# Altium PCB HBridge.PcbDoc (part 1 of 4)
Units mil, origin at the board's own origin, x right, y up, seen from the top; angles counter-clockwise.
Board outline 2900.19 x 4650 mil, 2 copper layers (Top Layer, Bottom Layer), stack 33.512 mil thick; 136 components, 122 nets, 499 pads, 559 vias.
Unrouted connection lines stored in the file: 1.
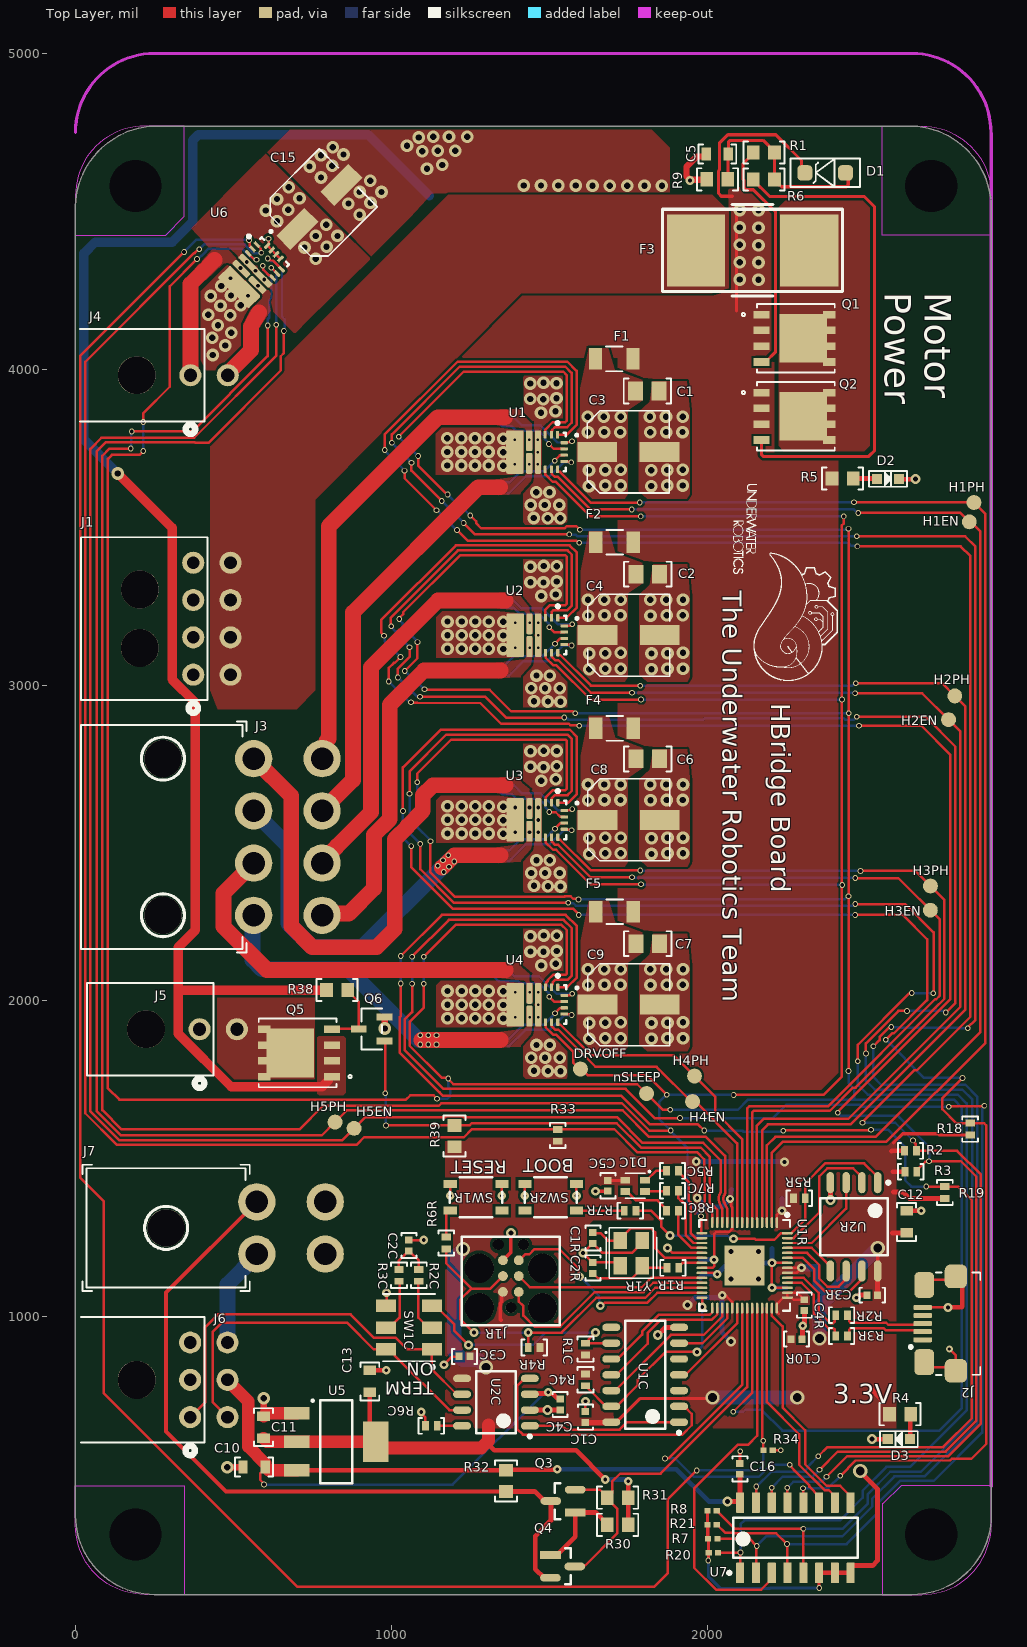
[diagram p0: Top Layer view]
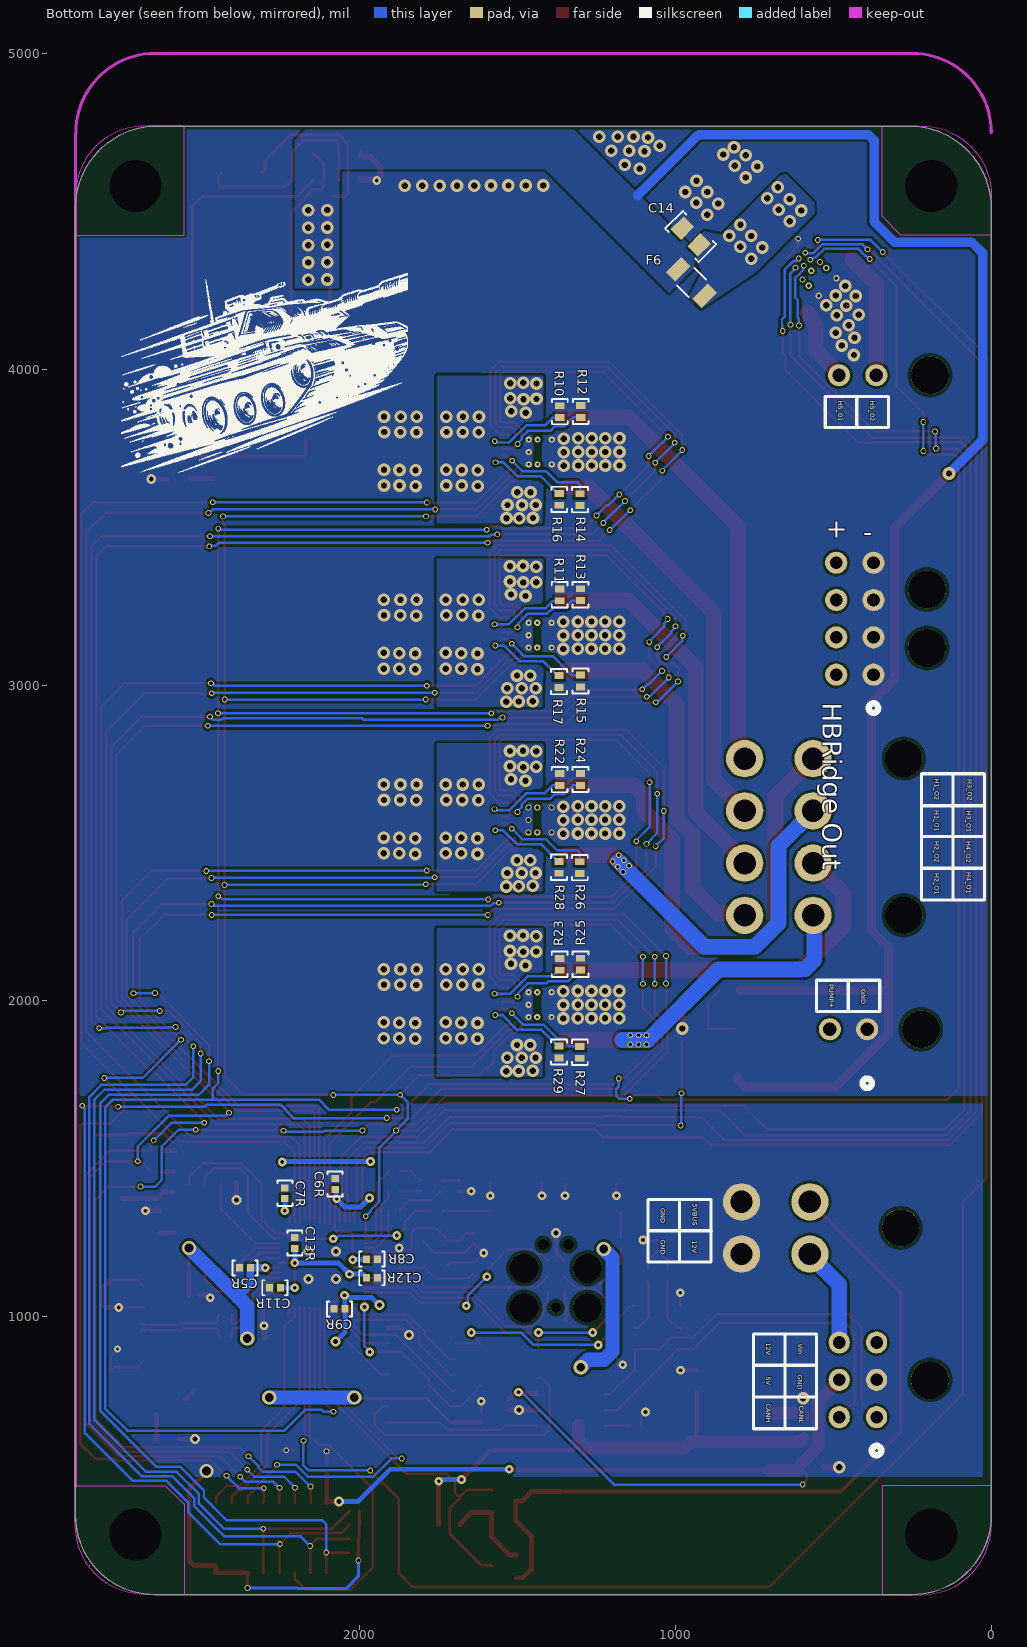
[diagram p1: Bottom Layer view, seen from below]
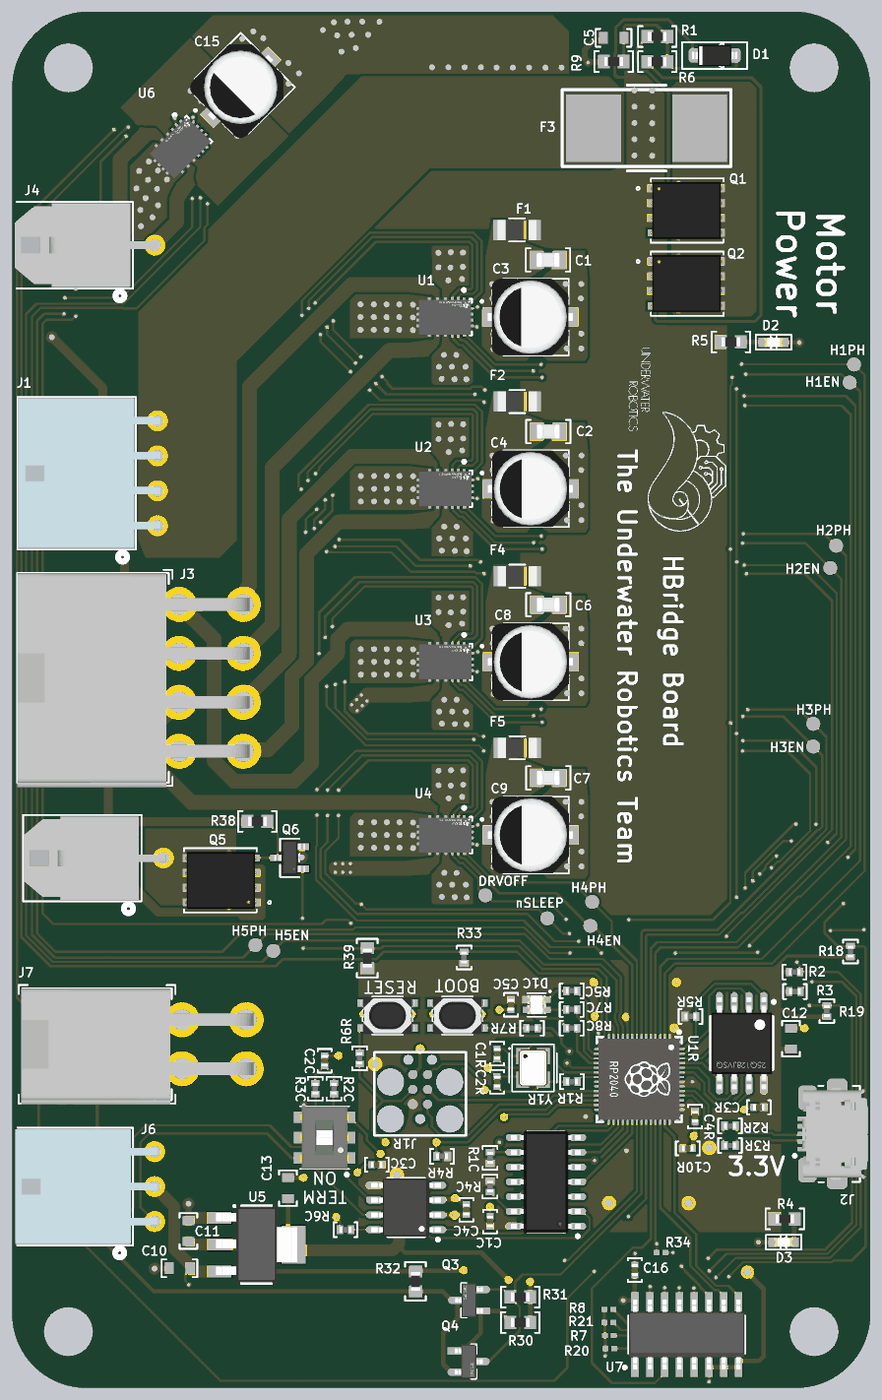
[diagram p4: 3D render of the assembled board from above, using the file's embedded part models]
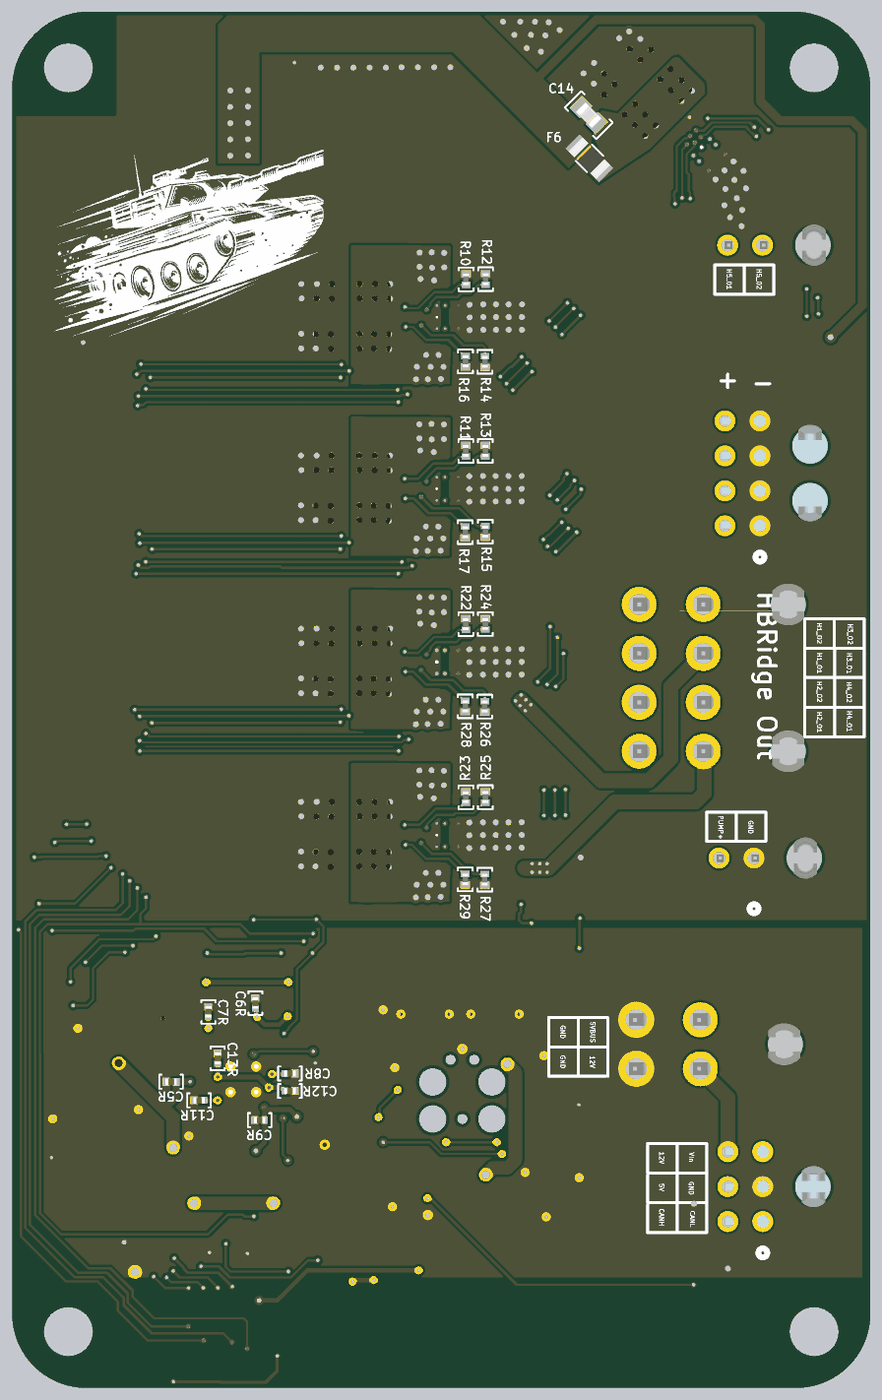
[diagram p5: 3D render of the assembled board from below, using the file's embedded part models]

## Layer stack, top to bottom
Top Solder: solder mask 1, SM-001, Dk 4
Top Layer: signal copper 2.7559
Dielectric 3: core 28, Core-039, Dk 4.8
Bottom Layer: signal copper 2.7559
Bottom Solder: solder mask 1, SM-001, Dk 4

## Board outline
0,370 0,4500 cw(c260,4510) 250,4770 2649.88,4770 cw(c2639.94,4509.94) 2900,4500 2900,4420 2899.88,350 2900,370 cw(c2649.94,370.06) 2649.88,120 250,120 cw(c250,370)

## Design rules (kind name [scope] priority, off if disabled: settings)
AcuteAngle [All] p1: minimum=8.00000000000000E+0001 checktracksonly=FALSE
BoardOutlineClearance "BoardOutlineClearance JLCPCB" [All] p1: gap=11.81 ignorepadtopadclearanceinfootprint=FALSE
Clearance "Clearance JLCPCB 4 layer" [All] p1: gap=7.87 ignorepadtopadclearanceinfootprint=FALSE except(5: Arc-SMDPad Arc-Via Track-SMDPad Track-Via SMDPad-SMDPad; 6.3: Arc-Arc Arc-Track Track-Track; 9.45: THPad-THPad THPad-Via Via-Via; 10: Arc-Hole Track-Hole SMDPad-Hole THPad-Hole Via-Hole Fill-Hole Poly-Hole Region-Hole Text-Hole)
DiffPairsRouting "Diff Pairs USB 2.0" [InDifferentialPairClass('USB 2.0')] p1: maxlimit=10 minlimit=5 mostfreqgap=7 toplayer_minwidth=7.87 toplayer_maxwidth=7.87 toplayer_prefwidth=7.87 bottomlayer_minwidth=7.87 bottomlayer_maxwidth=7.87 bottomlayer_prefwidth=7.87 maxuncoupledlength=500
DiffPairsRouting "Diff Pairs PCIe Gen 2" [InDifferentialPairClass('PCIe Gen 2')] p2: maxlimit=5 minlimit=5 mostfreqgap=5 toplayer_minwidth=5.53 toplayer_maxwidth=5.53 toplayer_prefwidth=5.53 bottomlayer_minwidth=5.53 bottomlayer_maxwidth=5.53 bottomlayer_prefwidth=5.53 impedanceprofiledriven=TRUE impedanceprofileid={D86E5A41-F98B-413D-93FD-A6E48D035561} maxuncoupledlength=500
HoleSize "HoleSize JLCPCB Pad" [IsPad] p1: absolutevalues=TRUE maxlimit=248.03 minlimit=19.68 maxpercent=80.000 minpercent=20.000
HoleSize "HoleSize JLCPCB 4 layer Cheap" [All] p2: absolutevalues=TRUE maxlimit=248.03 minlimit=11.81 maxpercent=80.000 minpercent=20.000
HoleToHoleClearance "HoleToHoleClearance JLCPCB Same Net" [All] p1: gap=10 allowstackedmicrovias=TRUE
MinimumAnnularRing "MinimumAnnularRing JLCPCB Via" [All] p1: minimumring=2.95
MinimumAnnularRing "MinimumAnnularRing JLCPCB Pad" [IsPad] p2: minimumring=9.84
MinimumAnnularRing "MinimumAnnularRing JLCPCB 1oz" [All] p3: minimumring=5.12
MinimumSolderMaskSliver "MinimumSolderMaskSliver JLCPCB" [All] p1: minsoldermaskwidth=3.94
PlaneClearance [All] p1: clearance=11.81
PlaneConnect [All] p1: planeconnectstyle=Direct reliefexpansion=20 reliefentries=4 reliefconductorwidth=10 reliefairgap=10
PolygonConnect [All] p1: connectstyle=Direct reliefconductorwidth=15 reliefentries=4 polygonreliefangle="45 Angle" airgapwidth=10
RoutingVias "RoutingVias JLCPCB 4 layer" [All] p1: holewidth=19.68 width=39.37 viastyle="Through Hole" minholewidth=11.81 minwidth=17.72 maxholewidth=50 maxwidth=80 useviatemplates=TRUE
SilkToSilkClearance [All] p1: silktosilkclearance=3
SilkToSolderMaskClearance "SilkToSolderMaskClearance JLCPCB" [IsPad] p1: minsilkscreentomaskgap=5.91 clearancetoexposedcopper=TRUE
SolderMaskExpansion "SolderMaskExpansion JLCPCB" [All] p1: expansion=1.5 istentingtop=FALSE
UnRoutedNet [All] p1: checkbadconnections=TRUE
Width "Width JLCPCB 4 layer" [All] p1: maxlimit=196.85 minlimit=7.09 preferedwidth=9.84 minimp=50.000000 maximp=50.000000 favimp=50.000000
21 further rules are at their usual default settings.

## Classes and differential pairs
component class HBridge: C1 C2 C3 C4 C5 C6 C7 C8 C9 C10 C11 C12 C13 C14 C15 C16 D1 D2 D3 DRVOFF F1 F2 F3 F4 F5 F6 H1EN H1PH H2EN H2PH H3EN H3PH H4EN H4PH H5EN H5PH J1 J2 J3 J4 J5 J6 J7 nSLEEP Q1 Q2 Q3 Q4 Q5 Q6 R1 R2 R3 R4 R5 R6 R7 R8 R9 R10 R11 R12 R13 R14 R15 R16 R17 R18 R19 R20 R21 R22 R23 R24 R25 R26 R27 R28 R29 R30 R31 R32 R33 R38 R39 U1 U2 U3 U4 U5 U6 U7
differential pair class "USB 2.0": USB USB_RP2040
component class U_RP2040_with_CAN: C1C C2C C3C C4C C5C D1C R1C R2C R3C R4C R5C R6C R7C R8C SW1C U1C U2C
component class U_RP2040_C: C1R C2R C3R C4R C5R C6R C7R C8R C9R C10R C11R C12R C13R J1R R1R R2R R3R R4R R5R R6R R7R SW1R SW2R U1R U2R Y1R
differential pair USB: +USB_P -USB_N
differential pair USB_RP2040: +USB_RP2040_P -USB_RP2040_N

## Components (designator, comment, footprint, x,y, rotation, side; value= is the part's Value field where it differs from the comment)
C1 "100nF Ceramic 50V" CAPACITOR_0805 1810.96,3931.13 r180 top value=0.1uF
C1C "100nF Ceramic 25V" CAPACITOR_0402 1614.92,682.05 r90 top value=0.1uF
C1R "27pF Ceramic 50V" CAPACITOR_0402 1638.54,1248.98 r270 top value=27pF
C2 "100nF Ceramic 50V" CAPACITOR_0805 1811.81,3351.13 r180 top value=0.1uF
C2C "4700pF Ceramic 25V" CAPACITOR_0402 1055.87,1225.35 r270 top value=4.7nF
C2R "27pF Ceramic 50V" CAPACITOR_0402 1638.54,1154.49 r90 top value=27pF
C3 "10uF electrolytic 63V" CAP_EEHZC1J100P 1750.58,3738 r0 top value=10uF
C3C "100nF Ceramic 25V" CAPACITOR_0402 1231.89,874.17 r180 top value=0.1uF
C3R "100nF Ceramic 6.3V" CAPACITOR_0402 2523.19,1067.87 r180 top value=0.1uF
C4 "10uF electrolytic 63V" CAP_EEHZC1J100P 1751.42,3158 r0 top value=10uF
C4C "100nF Ceramic 25V" CAPACITOR_0402 1535,722 r270 top value=0.1uF
C4R "1uF Ceramic 16V" CAPACITOR_0402 2307.83,1036.38 r270 top value=1uF
C5 "1uF Ceramic 16V" CAPACITOR_0603 2032.5,4681.5 r0 top value=1uF
C5C "1uF Ceramic 16V" CAPACITOR_0402 1685.79,1414.33 r270 top value=1uF
C5R "100nF Ceramic 6.3V" CAPACITOR_0402 2362.95,1154.49 r0 bottom value=0.1uF
C6 "100nF Ceramic 50V" CAPACITOR_0805 1811.81,2766.13 r180 top value=0.1uF
C6R "100nF Ceramic 6.3V" CAPACITOR_0402 2078,1420 r90 bottom value=0.1uF
C7 "100nF Ceramic 50V" CAPACITOR_0805 1811.81,2181.13 r180 top value=0.1uF
C7R "100nF Ceramic 6.3V" CAPACITOR_0402 2236.97,1390.71 r90 bottom value=0.1uF
C8 "10uF electrolytic 63V" CAP_EEHZC1J100P 1751.43,2573 r0 top value=10uF
C8R "100nF Ceramic 6.3V" CAPACITOR_0402 1961.38,1182.15 r180 bottom value=0.1uF
C9 "10uF electrolytic 63V" CAP_EEHZC1J100P 1751.42,1988 r0 top value=10uF
C9R "100nF Ceramic 6.3V" CAPACITOR_0402 2063.74,1024.57 r0 bottom value=0.1uF
C10 "10uF Ceramic 6.3V" CAPACITOR_0603 565.49,524 r180 top
C10R "100nF Ceramic 6.3V" CAPACITOR_0402 2283,929 r0 top value=0.1uF
C11 "10uF Ceramic 6.3V" CAPACITOR_0603 595.49,650 r90 top
C11R "1uF Ceramic 16V" CAPACITOR_0402 2268.46,1091.5 r0 bottom value=1uF
C12 "10uF Ceramic 6.3V" CAPACITOR_0603 2632,1300 r90 top
C12R "100nF Ceramic 6.3V" CAPACITOR_0402 1961.38,1122.99 r180 bottom value=0.1uF
C13 "10uF Ceramic 6.3V" CAPACITOR_0603 932,795 r90 top
C13R "100nF Ceramic 6.3V" CAPACITOR_0402 2205.47,1233.23 r90 bottom value=0.1uF
C14 "100nF Ceramic 50V" CAPACITOR_0805 951.6,4420.3 r225 bottom value=0.1uF
C15 "10uF electrolytic 63V" CAP_EEHZC1J100P 772.21,4514.38 r45 top value=10uF
C16 "100nF Ceramic 25V" CAPACITOR_0402 2104,518.13 r270 top value=0.1uF
D1 "Zener_Diode_10V_410mW" SOD-123 2374,4622 r180 top
D1C "EAST1616RGBB4" LED_0606_4SMD 1772.4,1414.33 r180 top
D2 "150060BS75000" LED_0603 2573,3653 r0 top
D3 "150060GS75000" LED_0603 2607,612 r180 top
DRVOFF "PCB Test Point" TESTPOINT_1.2MM 1599,1784 r0 top (schematic designator TP1)
F1 "0685H9150-01" 0501Series_LTF 1706.15,4032.51 r180 top
F2 "0685H9150-01" 0501Series_LTF 1707,3452.51 r180 top
F3 "1245HC60-RTR" "2-SMD Fuse" 2144,4376.52 r0 top
F4 "0685H9150-01" 0501Series_LTF 1707,2862.51 r180 top
F5 "0685H9150-01" 0501Series_LTF 1707,2282.51 r180 top
F6 "0685H9150-01" 0501Series_LTF 949.17,4274.5 r225 bottom
H1EN "PCB Test Point" TESTPOINT_1.2MM 2830.25,3516.81 r0 top (schematic designator TP2)
H1PH "PCB Test Point" TESTPOINT_1.2MM 2845,3578 r0 top (schematic designator TP5)
H2EN "PCB Test Point" TESTPOINT_1.2MM 2764.63,2890.37 r0 top (schematic designator TP3)
H2PH "PCB Test Point" TESTPOINT_1.2MM 2784.33,2965.68 r0 top (schematic designator TP6)
H3EN "PCB Test Point" TESTPOINT_1.2MM 2707,2287 r180 top (schematic designator TP7)
H3PH "PCB Test Point" TESTPOINT_1.2MM 2707.3,2363.72 r180 top (schematic designator TP9)
H4EN "PCB Test Point" TESTPOINT_1.2MM 1954,1681 r0 top (schematic designator TP8)
H4PH "PCB Test Point" TESTPOINT_1.2MM 1960.11,1761.89 r90 top (schematic designator TP10)
H5EN "PCB Test Point" TESTPOINT_1.2MM 882.39,1596.39 r0 top (schematic designator TP11)
H5PH "PCB Test Point" TESTPOINT_1.2MM 822,1616 r90 top (schematic designator TP12)
J1 "Microfit+ R/A" CONN_MOLEX_MICROFIT+_8POS_R/A 373,3032.89 r270 top
J1R "TagConnect SWD" TC2030-MCP 1378.7,1028.5 r90 top
J2 "USB_MICRO R/A" CONN_MINIUSB 2788,978 r90 top
J3 "Mini-Fit Jr R/A" "CONN_MOLEX_MINIFIT JR_8 POS_R/A" 277,2767 r270 top
J4 "Microfit R/A" "CONN_MOLEX_MICROFIT_2 POS_R/A" 364.02,3981 r270 top
J5 "Microfit R/A" "CONN_MOLEX_MICROFIT_2 POS_R/A" 393.08,1910 r270 top
J6 "Microfit+ R/A" CONN_MOLEX_MICROFIT_6_POS_R/A 363.3,800 r270 top
J7 "Mini-Fit Jr R/A" "CONN_MOLEX_MINIFIT JR_4 POS_R/A" 287,1281 r270 top
nSLEEP "PCB Test Point" TESTPOINT_1.2MM 1808.5,1706.5 r0 top (schematic designator TP4)
Q1 "MOSFET P-Ch 30V 60A SO-8" MOSFET_7DP-T1-GE3_VIS#1 2279.5,4098.01 r0 top
Q2 "MOSFET P-Ch 30V 60A SO-8" MOSFET_7DP-T1-GE3_VIS#1 2279.5,3851 r0 top
Q3 "MMBT3904-7-F" FP-SOT23-IPC_A 1544,416 r180 top
Q4 "MMBT3904-7-F" FP-SOT23-IPC_A 1542.55,209 r0 top
Q5 "SIR167DP-T1-GE3" MOSFET_7DP-T1-GE3_VIS#2 705.2,1835 r180 top
Q6 "AO3404A" SOT-23-3 938,1911 r90 top
R1 "27 Ohm 5% 1/8W" RESISTOR_0603 2180,4685.99 r0 top
R1C "10k Ohm 1% 1/16W" RESISTOR_0402 1614.92,897.2 r90 top
R1R "1k Ohm 1% 1/16W" RESISTOR_0402 1891.57,1154.49 r180 top
R2 "10k Ohm 1% 1/16W" RESISTOR_0402 2644,1525 r0 top
R2C "60.4 Ohm 1% 1/16W" RESISTOR_0402 1087.36,1130.87 r90 top
R2R "27 Ohm 1% 1/16W" RESISTOR_0402 2425.94,1004.88 r180 top
R3 "10k Ohm 1% 1/16W" RESISTOR_0402 2645,1458.99 r0 top
R3C "60.4 Ohm 1% 1/16W" RESISTOR_0402 1024.37,1130.87 r90 top
R3R "27 Ohm 1% 1/16W" RESISTOR_0402 2425.94,938.87 r180 top
R4 "62 Ohm 1% 1/4W" RESISTOR_0603 2611,691 r180 top
R4C "10k Ohm 1% 1/16W" RESISTOR_0402 1614.92,800.16 r270 top
R4R "10k Ohm 1% 1/16W" RESISTOR_0402 1452.52,902.52 r180 top
R5 "1k Ohm 5% 1/8W" RESISTOR_0603 2429,3654 r0 top
R5C "604 Ohm 1% 1/16W" RESISTOR_0402 1890.51,1461.57 r180 top
R5R "10k Ohm 1% 1/16W" RESISTOR_0402 2292.09,1374.96 r0 top
R6 "27 Ohm 5% 1/8W" RESISTOR_0603 2180,4600.99 r180 top
R6C "10k Ohm 1% 1/16W" RESISTOR_0402 1126.73,654.29 r180 top
R6R "1k Ohm 1% 1/16W" RESISTOR_0402 1173.98,1233.23 r270 top
R7 "RC0402FR-07210RL" RESC1005X40X25LL05T10 2018,297 r0 top
R7C "200 Ohm 1% 1/16W" RESISTOR_0402 1890.51,1398.58 r180 top
R7R "1k Ohm 1% 1/16W" RESISTOR_0402 1756.65,1335.59 r0 top
R8 "RC0402FR-07210RL" RESC1005X40X25LL05T10 2016,385 r0 top
R8C "200 Ohm 1% 1/16W" RESISTOR_0402 1890.51,1335.59 r180 top
R9 "1k Ohm 5% 1/8W" RESISTOR_0603 2032.5,4601.5 r180 top
R10 "0 Ohm 1% 1/16W" RESISTOR_0402 1366.15,3865.7 r90 bottom
R11 "0 Ohm 1% 1/16W" RESISTOR_0402 1367,3285.7 r90 bottom
R12 "0 Ohm 1% 1/16W" RESISTOR_0402 1300.15,3866 r90 bottom
R13 "0 Ohm 1% 1/16W" RESISTOR_0402 1301,3286 r90 bottom
R14 "0 Ohm 1% 1/16W" RESISTOR_0402 1302.15,3587 r270 bottom
R15 "0 Ohm 1% 1/16W" RESISTOR_0402 1301,3013 r270 bottom
R16 "0 Ohm 1% 1/16W" RESISTOR_0402 1368.15,3587.99 r270 bottom
R17 "0 Ohm 1% 1/16W" RESISTOR_0402 1369,3011 r270 bottom
R18 "10k Ohm 1% 1/16W" RESISTOR_0402 2833,1594 r90 top
R19 "10k Ohm 1% 1/16W" RESISTOR_0402 2753,1393 r90 top
R20 "210" RESC1005X40X25LL05T10 2020,253 r0 top
R21 "RC0402FR-07210RL" RESC1005X40X25LL05T10 2016,341 r0 top
R22 "0 Ohm 1% 1/16W" RESISTOR_0402 1367,2700.7 r90 bottom
R23 "0 Ohm 1% 1/16W" RESISTOR_0402 1367,2115.7 r90 bottom
R24 "0 Ohm 1% 1/16W" RESISTOR_0402 1301,2701 r90 bottom
R25 "0 Ohm 1% 1/16W" RESISTOR_0402 1301,2116 r90 bottom
R26 "0 Ohm 1% 1/16W" RESISTOR_0402 1303,2422 r270 bottom
R27 "0 Ohm 1% 1/16W" RESISTOR_0402 1303,1837 r270 bottom
R28 "0 Ohm 1% 1/16W" RESISTOR_0402 1369,2422.96 r270 bottom
R29 "0 Ohm 1% 1/16W" RESISTOR_0402 1369,1837.96 r270 bottom
R30 "1k Ohm 5% 1/8W" RESISTOR_0603 1717,340.82 r180 top
R31 "1k Ohm 5% 1/8W" RESISTOR_0603 1717,426.83 r180 top
R32 "1k Ohm 5% 1/8W" RESISTOR_0603 1363,480 r270 top
R33 "10k Ohm 1% 1/16W" RESISTOR_0402 1527,1574 r90 top
R34 "RC0402FR-07210RL" RESC1005X40X25LL05T10 2193,577 r180 top (schematic designator R21)
R38 "10k Ohm 5% 1/10W" RESISTOR_0603 828.5,2033.93 r0 top
R39 "10k Ohm 5% 1/10W" RESISTOR_0603 1200,1572 r90 top
SW1C "Switch DPDT" CAS-220TA 1055.87,965.51 r90 top
SW1R "434123025826" SMD_434123025826 1268.46,1377.91 r180 top
SW2R "434123025826" SMD_434123025826 1504.69,1377.91 r180 top
U1 "DRV8243HQRXYRQ1" FP-RXY0014A-MFG 1462.5,3737.84 r270 top
U1C "MCP2517FD" SOIC-14 1803.9,815.91 r180 top
U1R "RP2040" "QFN-56 RP2040" 2118.86,1162.36 r270 top locked
U2 "DRV8243HQRXYRQ1" FP-RXY0014A-MFG 1463.35,3157.84 r270 top
U2C "CAN Transceiver" SOIC-8 1331.46,729.29 r180 top
U2R "W25Q128JVSIQ" "SOIC-8 W25QxJV" 2465.32,1284.47 r270 top
U3 "DRV8243HQRXYRQ1" FP-RXY0014A-MFG 1463.35,2572.84 r270 top
U4 "DRV8243HQRXYRQ1" FP-RXY0014A-MFG 1463.35,1987.84 r270 top
U5 "LM1117IMPX-3.3/NOPB" SOT-223-4 826,604 r0 top
U6 "DRV8243HQRXYRQ1" FP-RXY0014A-MFG 568.52,4310.57 r315 top
U7 "CD74HC4051M96" D0016A_M 2279.81,300 r90 top
Y1R "CRYSTAL 12.0000MHZ 18PF SMD" "4-SMD, NO LEAD CRYSTAL 3.2x2.5mm" 1725.16,1241.1 r270 top

## Footprints (in the part's own frame and the unit in brackets; to place one, negate y for a bottom-side part, rotate by r counter-clockwise, add the part's x,y. Pads: shape width x height; smd on the part's side, far side on the other; paste and mask are expansions set on the pad)
"2-SMD Fuse" [mm]
  rect 4.7x5.8 smd paste+0 mask+0: 1(-4.55,0) 2(4.55,0)
  silkscreen extent -7.24,-3.68 7.24,3.68
"4-SMD, NO LEAD CRYSTAL 3.2x2.5mm" [mm]
  rrect0% 1.4x1.1 smd: 1(0,0) 2(2.032,0) 3(2.032,1.778) 4(0,1.778)
  silkscreen extent -1.02,-1.2 3.05,2.92, body extent -0.58,-0.36 2.62,2.14, height 0.82
0501Series_LTF [mil]
  rect 42x68 smd paste+0 mask+0: 1(-59.5,0) 2(59.5,0)
  silkscreen extent -26,-39 26,39, body extent -66,-34 66,34, height 23
CAP_EEHZC1J100P [mm]
  rect 3.2x1.6 smd: 1(-2.5,0) 2(2.5,0)
  silkscreen extent -4.25,-3.3 3.3,3.3, body extent -3.65,-3.3 3.65,3.3, height 5.8
CAPACITOR_0402 [mm]
  rect 0.56x0.6 smd: 1(-0.435,0) 2(0.435,0)
  silkscreen extent -1.02,-0.6 1.02,0.6, body extent -0.5,-0.28 0.5,0.27, height 0.51
CAPACITOR_0603 [mil] "CAPACITOR 0603"
  rect 30x40 smd: 1(-35,0) 2(35,0)
  silkscreen extent -60,-30 60,30, body extent -31,-16 32,16, height 31
CAPACITOR_0805 [mm] "CAPACITOR 0805"
  rect 1.2x1.5 smd: 1(-0.95,0) 2(0.95,0)
  silkscreen extent -1.91,-1 1.9,1, body extent -1,-0.62 1,0.63, height 1.26
CAS-220TA [mm] "SWITCH SLIDE DPDT 100MA 6V"
  rrect0% 1x1.6 smd: 1(-1.75,-1.85) 2(0,-1.85) 3(1.75,-1.85) 4(-1.75,1.85) 5(0,1.85) 6(1.75,1.85)
  silkscreen extent -3.3,-2.1 2.7,2.1, body extent -2.7,-2.1 2.7,2.1, height 2.51
CONN_MINIUSB [mm] "USB2.0 Micro-B Receptacle SMD R/A"
  rrect50% 0.4x1.5 smd: 1(-1.3,2.675) 2(-0.65,2.675) 3(0,2.675) 4(0.65,2.675) 5(1.3,2.675)
  rrect50% 2.1x1.6 smd: 6(-3.1,2.55) 7(3.1,2.55)
  rrect50% 1.9x1.8 smd: 8(3.8,0) 9(-3.8,0)
  silkscreen extent -4.14,-1.96 4.11,3.75, body extent -3.96,-2.67 3.96,2.99, height 2.72
CONN_MOLEX_MICROFIT+_8POS_R/A [mil] "MICROFIT+ 212528"
  round 70 / inner oval 60x70 / far side round 70 hole 40 paste-99999 mask+0: 1(0,0) 2(-118.11,0) 3(-236.22,0) 4(-354.33,0) 5(0,118.11) 6(-118.11,118.11) 7(-236.22,118.11) 8(-354.33,118.11)
  round 120 / inner round 60 / far side round 120 hole 120 unplated paste-99999 mask-60: 9(-269.68,-169.29) 10(-84.65,-169.29)
  silkscreen extent -435,-355 121,45, body extent -431,-351 75,131, height 325
"CONN_MOLEX_MICROFIT_2 POS_R/A" [mil] "0430450200"
  round 70 hole 42 paste-99999 mask+0: 1(0,0) 2(0,118.11)
  round 120 / inner round 60 / far side round 120 hole 120 unplated paste-99999 mask-60: 3(0,-170.08)
  silkscreen extent -146,-349 186,44, body extent -141,-355 141,127, height 343
CONN_MOLEX_MICROFIT_6_POS_R/A [mil] "CONN HEADER R/A 6POS 3MM"
  round 70 / inner round 70 / far side oval 70x66.93 hole 40 paste-99999 mask+0: 1(118.11,0) 2(0,0) 3(-118.11,0) 4(118.11,118.11) 5(0,118.11) 6(-118.11,118.11)
  round 120 / inner round 60 / far side round 120 hole 120 unplated paste-99999 mask-60: 7(0,-169.29)
  silkscreen extent -199,-346 239,45, body extent -194,-353 194,129, height 325
"CONN_MOLEX_MINIFIT JR_4 POS_R/A" [mm] "Molex Minifit Jr 5569 4 Pos R/A"
  round 3 hole 1.8: 1(2.1,7.3) 2(-2.1,7.3) 3(2.1,12.8) 4(-2.1,12.8)
  round 3 hole 3 unplated mask+0: ""(0,0)
  silkscreen extent -5.08,-6.73 5.08,6.73, body extent -4.8,-6.5 5.2,13.44, height 11.4
"CONN_MOLEX_MINIFIT JR_8 POS_R/A" [mm] "Molex Minifit Jr 5569 8 Pos R/A"
  round 3 hole 1.801: 1(12.6,7.3) 2(8.4,7.3) 5(12.6,12.8) 6(8.4,12.8)
  round 3 hole 1.8: 3(4.2,7.3) 4(0,7.3) 7(4.2,12.8) 8(0,12.8)
  round 3 hole 3 unplated mask+0: ""(0,0) ""(12.6,0)
  silkscreen extent -2.98,-6.6 15.58,6.73, body extent -2.7,-6.6 15.7,13.34, height 11.01
D0016A_M [mm] "SOIC, 16-Leads, Body 10x4mm, Pitch 1.27mm, IPC Low Density"
  rrect15% 1.65x0.65 smd: 1(-2.825,4.445) 2(-2.825,3.175) 3(-2.825,1.905) 4(-2.825,0.635) 5(-2.825,-0.635) 6(-2.825,-1.905) 7(-2.825,-3.175) 8(-2.825,-4.445) 9(2.825,-4.445) 10(2.825,-3.175) 11(2.825,-1.905) 12(2.825,-0.635) 13(2.825,0.635) 14(2.825,1.905) 15(2.825,3.175) 16(2.825,4.445)
  silkscreen extent -2.95,-5 1.6,5.44, body extent -3,-4.95 3,4.95, height 1.59
FP-RXY0014A-MFG [mm]
  rrect40% 0.6x0.25 smd paste+0 mask-1000: 1(-1.4,1.625) 2(-1.4,1.125) 3(-1.4,0.625) 8(1.4,0.625) 9(1.4,1.125) 10(1.4,1.625)
  rrect40% 3.5x0.5 smd paste-1000 mask-1000: 4(0,0.05)
  rrect40% 1.675x0.5 smd paste-1000 mask-1000: 5(-0.913,-0.65) 7(0.913,-0.65)
  rrect14% 3.5x1.4 smd paste-1000 mask-1000: 6(0,-1.8)
  rrect40% 0.25x0.6 smd paste+0 mask-1000: 11(0.75,2.15) 12(0.25,2.15) 13(-0.25,2.15) 14(-0.75,2.15)
  silkscreen extent -2.45,1.5 1.55,2.3, body extent -1.85,-2.6 1.85,2.55, height 0.25
FP-SOT23-IPC_A [mm]
  rect 1.659x0.627 smd paste+0 mask+0: 1(-0.977,0.915)
  rrect100% 1.659x0.627 smd paste+0 mask+0: 2(-0.977,-0.915) 3(0.977,0)
  silkscreen extent 0.23,-1.45 0.65,1.45, body extent -2.31,-1.95 2.31,1.95, height 0.25
LED_0603 [mil] "LED 0603"
  rect 32x32 smd: 1(-35,0) 2(35,0)
  silkscreen extent -60,-25 60,25, body extent -31,-16 32,16, height 28
LED_0606_4SMD [mm]
  rrect0% 0.8x0.55 smd: 1(-0.8,-0.45) 2(-0.8,0.45) 3(0.8,0.45) 4(0.8,-0.45)
  silkscreen extent -1.22,-1.22 0.8,1.02, body extent -0.8,-0.8 0.8,0.8, height 0.35
MOSFET_7DP-T1-GE3_VIS#1 [mil]
  rect 50x24 smd: 1(-107.5,75) 2(-107.5,25) 3(-107.5,-25) 4(-107.5,-75)
  rect 150x154 smd: D(24.5,0)
  rect 40x24 smd: D(107.5,-75) D(107.5,-25) D(107.5,25) D(107.5,75)
  silkscreen extent -169,-108 125,108, body extent -121,-101 121,101, height 41
MOSFET_7DP-T1-GE3_VIS#2 [mil]
  rect 50x24 smd: 1(-107.5,75) 2(-107.5,25) 3(-107.5,-25) 4(-107.5,-75)
  rect 150x154 smd: D(24.5,0)
  rect 40x24 smd: D(107.5,75) D(107.5,-25) D(107.5,25) D(107.5,-75)
  Top Layer region: 1.75,77 1.75,77 1.75,77 1.75,77 1.75,77 1.75,77 1.75,77 1.75,77
  Top Layer region: 1.75,-77 1.75,-77 1.75,-77 1.75,-77 1.75,-77 1.75,-77 1.75,-77 1.75,-77
  silkscreen extent -170,-109 125,109, body extent -121,-101 121,101, height 41
"QFN-56 RP2040" [mm] "QFN, 56-Leads, Body 7.00x7.00mm, Pitch 0.40mm, Thermal Pad 3.10x3.10mm, IPC Medium Density"
  oval 0.875x0.2 smd: 1(-3.437,2.6) 2(-3.437,2.2) 3(-3.437,1.8) 4(-3.437,1.4) 5(-3.437,1) 6(-3.437,0.6) 7(-3.437,0.2) 8(-3.437,-0.2) 9(-3.437,-0.6) 10(-3.437,-1) 11(-3.437,-1.4) 12(-3.437,-1.8) 13(-3.437,-2.2) 14(-3.437,-2.6) 29(3.437,-2.6) 30(3.437,-2.2) 31(3.437,-1.8) 32(3.437,-1.4) 33(3.437,-1) 34(3.437,-0.6) 35(3.437,-0.2) 36(3.437,0.2) 37(3.437,0.6) 38(3.437,1) 39(3.437,1.4) 40(3.437,1.8) 41(3.437,2.2) 42(3.437,2.6)
  oval 0.2x0.875 smd: 15(-2.6,-3.437) 16(-2.2,-3.437) 17(-1.8,-3.437) 18(-1.4,-3.437) 19(-1,-3.437) 20(-0.6,-3.437) 21(-0.2,-3.437) 22(0.2,-3.437) 23(0.6,-3.437) 24(1,-3.437) 25(1.4,-3.437) 26(1.8,-3.437) 27(2.2,-3.437) 28(2.6,-3.437) 43(2.6,3.437) 44(2.2,3.437) 45(1.8,3.437) 46(1.4,3.437) 47(1,3.437) 48(0.6,3.437) 49(0.2,3.437) 50(-0.2,3.437) 51(-0.6,3.437) 52(-1,3.437) 53(-1.4,3.437) 54(-1.8,3.437) 55(-2.2,3.437) 56(-2.6,3.437)
  rect 3.2x3.2 smd: 57(0,0)
  silkscreen extent -4.19,-3.65 3.65,3.65, body extent -3.52,-3.52 3.52,3.52, height 0.85
RESC1005X40X25LL05T10 [mm] "Chip Resistor, 2-Leads, Body 1.00x0.50mm, IPC High Density"
  rect 0.5x0.45 smd: 1(-0.375,0) 2(0.375,0)
  body extent -0.53,-0.27 0.53,0.28, height 0.4
RESISTOR_0402 [mm] "Resistor 0402"
  rect 0.55x0.75 smd: 1(-0.475,0) 2(0.475,0)
  silkscreen extent -1.02,-0.64 1.02,0.64, body extent -0.5,-0.25 0.5,0.25, height 0.25
RESISTOR_0603 [mil] "Resistor 0603"
  rect 40x45 smd: 1(-33.5,0) 2(33.5,0)
  silkscreen extent -65,-35 65,35, body extent -31,-16 32,16, height 16
SMD_434123025826 [mm]
  rect 1.05x0.65 smd: A1(-2.075,1.075) A2(2.075,1.075) B1(-2.075,-1.075) B2(2.075,-1.075)
  silkscreen extent -2.1,-1.6 2.1,1.6, body extent -2.3,-1.6 2.3,1.6, height 2.5
SOD-123 [mm] "Schottky Diode SOD-123"
  rrect50% 1.2x1.22 smd: 1(-1.635,0) 2(1.635,0)
  silkscreen extent -2.79,-1.14 2.79,1.14, body extent -1.95,-0.9 1.95,0.9, height 1.18
SOIC-8 [mm] "SOIC, 8-Leads, Body 4.90x3.90mm, Pitch 1.27mm, IPC Medium Density"
  oval 1.45x0.6 smd: 1(-2.725,1.905) 2(-2.725,0.635) 3(-2.725,-0.635) 4(-2.725,-1.905) 5(2.725,-1.905) 6(2.725,-0.635) 7(2.725,0.635) 8(2.725,1.905)
  silkscreen extent -2.85,-2.5 1.6,2.88, body extent -3,-2.5 3,2.5, height 1.75
"SOIC-8 W25QxJV" [mm] "SOIC, 8-Leads, Body 5.28x5.28mm, Pitch 1.27mm, IPC Medium Density"
  oval 1.7x0.6 smd: 1(-3.55,1.905) 2(-3.55,0.635) 3(-3.55,-0.635) 4(-3.55,-1.905) 5(3.55,-1.905) 6(3.55,-0.635) 7(3.55,0.635) 8(3.55,1.905)
  silkscreen extent -3.67,-2.7 2.3,2.88, body extent -3.95,-2.62 3.95,2.62, height 1.95
SOIC-14 [mm] "SOIC, 14-Leads, Body 8.65x3.90mm, Pitch 1.27mm, IPC Medium Density"
  oval 1.45x0.6 smd: 1(-2.725,3.81) 2(-2.725,2.54) 3(-2.725,1.27) 4(-2.725,0) 5(-2.725,-1.27) 6(-2.725,-2.54) 7(-2.725,-3.81) 8(2.725,-3.81) 9(2.725,-2.54) 10(2.725,-1.27) 11(2.725,0) 12(2.725,1.27) 13(2.725,2.54) 14(2.725,3.81)
  silkscreen extent -2.85,-4.35 1.6,4.78, body extent -3,-4.4 3,4.4, height 1.7
SOT-23-3 [mil]
  rect 22x50 smd paste+0 mask+4: 1(-37.5,-41) 2(37.5,-41) 3(0,41)
  silkscreen extent -65,-33 65,33, body extent -60,-52 60,52, height 44
SOT-223-4 [mm]
  rect 2.05x1 smd paste+0 mask+0.102: 1(-3.175,2.3) 2(-3.175,0) 3(-3.175,-2.3)
  rect 2.05x3.25 smd paste+0 mask+0.102: 4(3.175,0)
  silkscreen extent -1.96,-3.35 1.3,3.35, body extent -3.5,-3.25 3.5,3.25, height 1.68
TC2030-MCP [mil]
  round 31 smd: 1(50,-25) 2(50,25) 3(100,-25) 4(100,25) 5(150,-25) 6(150,25)
  round 34 hole 35 unplated: A(0,0) B(200,40) C(200,-40)
  round 92 hole 93 unplated: D(0,-100) E(125,-100) F(0,100) G(125,100)
  silkscreen extent -55,-155 225,155
TESTPOINT_1.2MM [mm]
  round 1.2 smd: TP(0,0)

## Part data
C1 C2 C6 C7 C14: library part CAPACITOR_0.1uF_0805, "Cap 100nF 50V +/-10% / Ceramic 0805", Supplier Part Number 1=38AH3645, Tolerance="+/- 10%", Voltage=50V, Made By="Robert Pafford", Supplier 1=Newark
C1C C3C C3R C4C C5R C6R C7R C8R C9R C10R C12R C13R: library part CAPACITOR_0.1uF_0402, "Cap 100nF 25V +/-10% / Ceramic 0402", Supplier Part Number 1=478-7868-1-ND, Tolerance="+/- 10%", Voltage=25V, Made By="Robert Pafford", Supplier 1=Digi-Key
C1R C2R: library part CAPACITOR_0.000027uF_0402, "Cap 27pF 50V +/-5% / Ceramic 0402", Supplier Part Number 1=445-5589-1-ND, Tolerance="+/- 5%", Voltage=50V, Made By="Robert Pafford", Supplier 1=Digi-Key
C2C: library part CAPACITOR_0.0047uF_0402, "4700 pF +/-10% 25V Ceramic Capacitor X7R 0402", Supplier Part Number 1=478-6195-1-ND, Tolerance="+/- 10%", Voltage=25V, Made By="Robert Pafford", Supplier 1=Digi-Key
C3 C4 C8 C9 C15: library part "CAP ALUM 10UF 20% 63V SMD", "10 µF 63 V Aluminum - Polymer Capacitors Radial, Can SMD 120mOhm", Max Voltage=63V, Supplier Part Number 1=P15466CT-ND, Tolerance="+/- 20%", Made By="Robert Pafford", Supplier 1=Digi-Key
C4R C5C C11R: library part CAPACITOR_1uF_0402, "Cap 1uF 16V +/-10% / Ceramic 0402", Supplier Part Number 1=478-0402YD105KAT4ADKR-ND, Tolerance="+/- 10%", Voltage=16V, Made By="Robert Pafford", Supplier 1=Digi-Key
C5: library part CAPACITOR_1uF_0603, "Cap 1uF 16V +/-10% / Ceramic 0603", Supplier Part Number 1=C1608X7R1C105K080AC, Tolerance="+/- 10%", Voltage=16V, Made By="Flip B", Supplier 1="Arrow Electronics"
C10 C11 C12 C13: library part CAPACITOR_10uF_0603, "Cap 10uF 6.3V +/-20% / Ceramic 0603", Supplier Part Number 1=1276-1119-1-ND, Tolerance="+/- 20%", Value (uF)="10 uF", Voltage=6.3V, ComponentLink1Description=Digikey, ComponentLink1URL=https://www.digikey.com/en/products/detail/samsung-electro-mechanics/CL10A106MQ8NNNC/3886777, Made By="Flip B", Supplier 1=Digi-Key
C16: library part CAPACITOR_0.1uF_0402, "Cap 100nF 25V +/-10% / Ceramic 0402", Supplier Part Number 1=7029569, Tolerance="+/- 10%", Voltage=25V, Made By="Robert Pafford", Supplier 1="Future Electronics"
D1: "Zener Diode", Package=SOD-123, Power=410mW, Supplier Part Number 1=3757-BZT52-C10_R1_00001CT-ND, Voltage - Zener=10V, ComponentLink1Description=Datasheet, ComponentLink1URL=https://www.panjit.com.tw/upload/datasheet/BZT52-C2V4_SERIES.pdf, Made By="Nathan A", Supplier 1=Digi-Key
D1C: library part LED_RGB_4SMD, "LED RGB CLEAR 4SMD", Blue Forward Current=5mA, Blue Forward Voltage=2.8V, Color=RGB, Package=4-SMD, Red Forward Voltage=1.8V, Supplier Part Number 1=1080-1552-1-ND, ComponentLink1Description=Datasheet, ComponentLink1URL=https://everlightamericas.com/index.php?controller=attachment&id_attachment=3220, Green Forward Current=5mA, Green Forward Voltage=2.8V, Made By="Robert Pafford", Red Forward Current=5mA, Supplier 1=Digi-Key
D2: library part LED_Blue_0603, "LED Blue Vf= 3.2V If = 0.020A / 150060BS75000", Color=Blue, Forward Current=20mA, Forward Voltage=3.2V, Package=0603, Supplier Part Number 1=732-4966-1-ND, Made By="Robert Pafford", Supplier 1=Digi-Key
D3: library part LED_Green_0603_3.2V, "LED Green Vf= 3.2V If = 0.025A / 150060GS75000", Color=Green, Forward Current=25mA, Forward Voltage=3.2V, Package=0603, Supplier Part Number 1=732-4971-1-ND, ComponentLink1Description=Datasheet, ComponentLink1URL=https://www.we-online.de/katalog/datasheet/150060GS75000.pdf, Made By="Flip B", Supplier 1=Digi-Key
DRVOFF H1EN H1PH H2EN H2PH H3EN H3PH H4EN H4PH H5EN H5PH nSLEEP: library part TESTPOINT, Made By="Robert Pafford"
F1 F2 F4 F5 F6: library part "Bel Fuse 15A", "Bel Fuse", Breaking Capacity=150A, Current Rating=15, Package=1206, Voltage Rating=32V, Created By="Nathan Ayer", Manufacturer_Part_Number=0685H9150-01, Mfr_Name="Bel Fuse", Response Time="Fast Blow"
F3: library part "Eaton 60A Fuse", "Eaton", Breaking Capacity=1kA, Current Rating=60A, Package=2-SMD, Voltage Rating=80V, ComponentLink1Description=DigiKey, ComponentLink1URL=https://www.digikey.com/en/products/detail/eaton-electronics-division/1245HC60-RTR/13913536, Created By="Nathan Ayer", Manufacturer_Part_Number=1245HC60-RTR, Mfr_Name=Eaton, Response Time="Fast Blow"
J1: library part CONN_MOLEX_MICROFIT+_8POS_R/A, "Molex Microfit+  / 212528 8 POS R/A Black", Color=Black, Current Rating=12.5A, Manufacturer=Molex, Supplier Part Number 1=900-2125280800-ND, Configuration=R/A, Pitch=3.0mm, Supplier 1=Digikey
J1R: library part TC2030_SWD, "TagConnect TC2030 ARM SWD 6-pin"
J2: library part CONN_MICROUSB, "Amphenol Micro USB-B / USB2.0 5 Pin Right Angle SMD", Color=Silver, Current Per Pin=1.8A, Manufacturer=Amphenol, Supplier Part Number 1=609-4613-1-ND, ComponentLink1Description=Datasheet, ComponentLink1URL=https://cdn.amphenol-icc.com/media/wysiwyg/files/documentation/datasheet/inputoutput/io_usb_micro.pdf?__cf_chl_jschl_tk__=05693735e19256298f6ef6ca2bb2e65c376a4f56-1625503833-0-Abitsb0-ufjOXJYs_S3J3r2iTn-nObalbmXUksF1VvO_h_WEmRdMlUD1I8-hmWSEVWzY1pirKnrPZWfgY3851qyBZe5ZvnNQePLGIzUgdEIQBVUyW36RsbYpDLEWxJ4horD-5gChFgobLYqwmG5aHl0E8lIn_twwPPrOxilK2gP0q9t_CNOs_u5fMqXvXUrlsOv8tIE2NRlu6NVP8qtkL2GjhlkeTUbDMF8WvvpPDTFOgvZ4Y16Ej8F8AhWos88mo5B1HssXozw0XrkJQIqERITUu6rqloz9kf4ZzhBHtDAt-IkiAFY_Ds9SW8FYKKTtINJVpHZQ6Gyu1FFM4Dc9MO0maE8_mmNcwlxqyRoRk_MPWW8VyByXWM5RSp52jteRKw7FeI9WIYvCbPAOy0Eyib-aseIQsnGbglBcUY6_2xp8GYaJM38H3dNvBPsSOfJBPndKedwKHllxjkucXn6xsN0sDXkpGN-cu8_2bDTJ0g-uUucKSCooYX-ApSDNGpkA_p9zv1SOAD8c0zaZVmtiBsN75QpVz2rzq9_BFxOywPvR, Configuration="Right Angle", Created By="Flip B", Number of Positions=5, Pitch=0.65mm, Series=10118192, Supplier 1=Digi-Key
J3: library part "CONN_MOLEX_MINIFIT JR_8POS_R/A", "Molex Minifit Jr. 5569  / 8 Pos R/A Natural", Color=Natural, Current Per Pin=13A, Manufacturer=Molex, Supplier Part Number 1=WM1354-ND, ComponentLink1Description=Datasheet, ComponentLink1URL=https://www.molex.com/pdm_docs/ps/PS-5556-001.pdf, Configuration="Right Angle", Created By="Flip B", Number of Positions=8, Pitch=4.2mm, Series="Minifit Jr 5569", Supplier 1=Digi-Key
J4 J5: library part "CONN_MOLEX_MICROFIT_2 POS_R/A", "CONN HEADER R/A 2POS", Color=Black, Current Rating=8A, Manufacturer=Molex, Supplier Part Number 1=WM1813-ND, Configuration=R/A, Pitch=3mm, Supplier 1=Digikey
J6: library part CONN_MOLEX_MICROFIT+_6POS_R/A, "Molex Microfit+  / 212528 6 POS R/A Black", Color=Black, Current Per Pin=12.5, Manufacturer=Molex, Supplier Part Number 1=900-2125280600-ND, Configuration=R/A, Pitch=3.0mm, Supplier 1=Digikey
J7: library part "CONN_MOLEX_MINIFIT JR_4POS_R/A", "Molex Minifit Jr. 5569  / 4 Pos R/A Natural", Color=Natural, Current Per Pin=13A, Manufacturer=Molex, Supplier Part Number 1=WM13112-ND, ComponentLink1Description=Datasheet, ComponentLink1URL=https://www.molex.com/pdm_docs/sd/026013115_sd.pdf, Configuration="Right Angle", Created By="Flip B", Number of Positions=4, Pitch=4.2mm, Series="Minifit Jr 5569", Supplier 1=Digi-Key
Q1 Q2: library part SIR167DP-T1-GE3, "P-Channel 30 V 60A (Tc) 65.8W (Tc) Surface Mount PowerPAK® SO-8", Mfr_Name=Vishay, Supplier Part Number 1=78-SIR167DP-T1-GE3, Copyright="Copyright (C) 2022 Ultra Librarian. All rights reserved.", Manufacturer_Part_Number=SIR167DP-T1-GE3, RefDes=RefDes, Supplier 1=Mouser, Type=DEV
Q3 Q4: library part CMP-2000-04931-2, "TRANS NPN 40V 0.2A SMD SOT23-3", Case/Package=SOT-23, Collector Base Voltage (VCBO)=60V, Collector Emitter Breakdown Voltage=40V, Collector Emitter Saturation Voltage=300mV, Continuous Collector Current=200mA, Emitter Base Voltage (VEBO)=6V, Frequency=300MHz, Max Operating Temperature=150°C, Max Power Dissipation=300mW, Min Operating Temperature=-55°C, Package Quantity=3000, Power Dissipation=350mW, Collector Emitter Voltage (VCEO)=40V, Contact Plating=Tin, Element Configuration=Single, Gain Bandwidth Product=300MHz, Height=1mm, hFE Min=100, Lead Free="Lead Free", Length=3.05mm, Max Breakdown Voltage=40V, Max Collector Current=200mA, Max Frequency=300MHz, Mount="Surface Mount", Number of Elements=1, Number of Pins=3, Packaging="Tape and Reel", Polarity=NPN, Radiation Hardening=No, REACH SVHC="No SVHC", Transition Frequency=300MHz, Voltage Rating (DC)=40V, Weight=0.000282oz, Width=1.4mm
Q5: "P-Channel 30 V 60A (Tc) 65.8W (Tc) Surface Mount PowerPAK® SO-8", Mfr_Name=Vishay, Supplier Part Number 1=78-SIR167DP-T1-GE3, Copyright="Copyright (C) 2022 Ultra Librarian. All rights reserved.", Manufacturer_Part_Number=SIR167DP-T1-GE3, RefDes=RefDes, Supplier 1=Mouser, Type=DEV
Q6: "N-Channel 30 V 5.8A (Ta) 1.4W (Ta) Surface Mount SOT-23-3", Amp Rating="5.8 A", Package=SOT23-3L, Power Dissipation="1.4W (Ta)", Supplier Part Number 1=785-1004-1-ND, Created By="Dylan T", FET Type=N-Channel, Manufacturer _Part_Number=AO3404A, Rds (on)="28mOhm @ 5.8A, 10V", SourceLibrary=ON_Semiconductor_2020-01-13, Supplier 1=Digi-Key, Vdss=30V, Vendor="Alpha & Omega Semiconductor Inc.", Vgs (Max)="3V @ 5.8A, 10V", Vgs (th)="3V @ 250µA"
R1 R6: library part RESISTOR_27_0603, "RES 27 OHM 5% 1/8W 0603", Digikey Part Numer=CR0603-JW-104ELFTR-ND, Supplier Part Number 1=2019-RK73B1JTTD270JCT-ND, Tolerance="+/- 5%", Value  (Ohms)=27, ComponentLink1Description=Datasheet, ComponentLink1URL=https://www.bourns.com/docs/product-datasheets/CRxxxxx.pdf, Made By="Robert Pafford", Supplier=Digikey, Supplier 1=Digi-Key, Wattage=1/8W
R1C R2 R3 R4C R4R R5R R6C R18 R19 R33: library part RESISTOR_10K_0402, "RES 10k OHM 1% 1/16W 0402", Digikey Part Numer=CR0603-JW-104ELFTR-ND, Supplier Part Number 1=YAG3436CT-ND, Tolerance="+/- 1%", Value  (Ohms)=10K, Made By="Robert Pafford", Supplier=Digikey, Supplier 1=Digi-Key, Wattage=1/16W
R1R R6R R7R: library part RESISTOR_1K_0402, "RES 1k OHM 1% 1/16W 0402", Digikey Part Numer=CR0603-JW-104ELFTR-ND, Supplier Part Number 1=13-AC0402FR-131KLCT-ND, Tolerance="+/- 1%", Value  (Ohms)=1K, Made By="Robert Pafford", Supplier=Digikey, Supplier 1=Digi-Key, Wattage=1/16W
R2C R3C: library part RESISTOR_60.4_0402, "RES 60.4 OHM 1% 1/16W 0402", Digikey Part Numer=CR0603-JW-104ELFTR-ND, Supplier Part Number 1=13-AC0402FR-0760R4LCT-ND, Tolerance="+/- 1%", Value  (Ohms)=60.4, Made By="Robert Pafford", Supplier=Digikey, Supplier 1=Digi-Key, Wattage=1/16W
R2R R3R: library part RESISTOR_27_0402, "RES 27 OHM 1% 1/16W 0402", Digikey Part Numer=CR0603-JW-104ELFTR-ND, Supplier Part Number 1=YAG5278DKR-ND, Tolerance="+/- 1%", Value  (Ohms)=27, Made By="Robert Pafford", Supplier=Digikey, Supplier 1=Digi-Key, Wattage=1/16W
R4: library part RESISTOR_62_0603, "RES SMD 62 OHM 1% 1/4W 0603", Digikey Part Numer=CR0603-JW-104ELFTR-ND, Supplier Part Number 1=541-RCS060362R0FKEACT-ND, Tolerance="+/- 1%", Value  (Ohms)=62, ComponentLink1Description=Datasheet, ComponentLink1URL=https://www.bourns.com/docs/product-datasheets/CRxxxxx.pdf, Made By="Robert Pafford", Supplier=Digikey, Supplier 1=Digi-Key, Wattage=1/4W
R5 R9 R30 R31 R32: library part RESISTOR_1K_0603, "RES 1k OHM 5% 1/8W 0603", Digikey Part Numer=CR0603-JW-104ELFTR-ND, Supplier Part Number 1=2019-RK73B1JTTD102JCT-ND, Tolerance="+/- 5%", Value  (Ohms)=1K, ComponentLink1Description=Datasheet, ComponentLink1URL=https://www.bourns.com/docs/product-datasheets/CRxxxxx.pdf, Made By="Robert Pafford", Supplier=Digikey, Supplier 1=Digi-Key, Wattage=1/8W
R5C: library part RESISTOR_604_0402, "RES 604 OHM 1% 1/16W 0402", Digikey Part Numer=CR0603-JW-104ELFTR-ND, Supplier Part Number 1=13-AC0402FR-07604RLCT-ND, Tolerance="+/- 1%", Value  (Ohms)=604, Made By="Robert Pafford", Supplier=Digikey, Supplier 1=Digi-Key, Wattage=1/16W
R7 R8 R21 R34: library part CMP-2002-07503-1, Manufacturer=Yageo, Part Number=RC0402FR-07210RL
R7C R8C: library part RESISTOR_200_0402, "RES 200 OHM 1% 1/16W 0402", Digikey Part Numer=CR0603-JW-104ELFTR-ND, Supplier Part Number 1=YAG3453CT-ND, Tolerance="+/- 1%", Value  (Ohms)=200, Made By="Robert Pafford", Supplier=Digikey, Supplier 1=Digi-Key, Wattage=1/16W
R10 R11 R12 R13 R14 R15 R16 R17 R22 R23 R24 R25 R26 R27 R28 R29: library part RESISTOR_0_0402, "RES 0 OHM 1% 1/16W 0402", Supplier Part Number 1=13-AC0402FR-070RLCT-ND, Tolerance="+/- 1%", Value  (Ohms)=0, Made By="Robert Pafford", Supplier 1=Digikey, Wattage=1/16W
R20: library part CMP-2002-07503-1, Manufacturer=Yageo, Part Number=RC0402FR-07210RL
R38 R39: library part RESISTOR_10K_0603, "RES 10k OHM 5% 1/10W 0603", Digikey Part Numer=CR0603-JW-104ELFTR-ND, Supplier Part Number 1=2019-RK73B1JTTD103JCT-ND, Tolerance="+/- 5%", Value  (Ohms)=10K, ComponentLink1Description=Datasheet, ComponentLink1URL=https://www.bourns.com/docs/product-datasheets/CRxxxxx.pdf, Made By="Robert Pafford", Supplier=Digikey, Supplier 1=Digi-Key, Wattage=1/8W
SW1C: library part CAS-220TA_CAN_TERM, "GOLD SWITCH FLUSH SLIDE DPDT 100MA 6V", Current Rating="100 mA", Supplier Part Number 1=CAS220JCT-ND, Voltage Rating=6VDC, Contact Finish=Gold, Made By="Robert Pafford", Supplier 1=Digi-Key, Switch Function=DPDT
SW1R SW2R: library part "Tactile Switch SMD", "WS-TASV J-Bend SMT Tact Switch, SPST-NO, 16VDC, 50mA, 260g", Manufacturer="Wurth Elektronik", Operating Temperature Max=85°C, Operating Temperature Min=-40°C, Rated Current=50mA, Rated Voltage=16VDC, Category="Tact Switches", Circuit=SPST-NO, ComponentLink1Description="Website Link", ComponentLink1URL=https://www.we-online.com/redexpert/article/434123025826?ad, ComponentLink2Description="Datasheet Link", ComponentLink2URL=https://www.we-online.com/redexpert/spec/434123025826?ad, Contact Material="Stainless Steel", Contact Plating=Silver, Height=2.5mm, Length=4.2mm, Manufacturer Part Number=434123025826, Match Code=WS-TASV, Mount="Surface Mount", Operation Force=260g, Packaging="Tape and Reel", Terminal Material="Copper Alloy", Terminal Plating=Silver, Washable=No, Width=3.2mm
U1 U2 U3 U4 U6: "Automotive 40-V, 12-A H-Bridge driver with integrated current sensing and feedback 14-VQFN-HR -40 to 125"
U1C: "CANbus Controller CAN 2.0 SPI Interface 14-SOIC", Made By="Robert Pafford", Max FD Rate="8 Mbps"
U1R: "Raspberry Pi RP2040", Crystal Frequency="12 MHz", Input Voltage=3.3V, Available Busses="SPI, I2C, PWM, USB", ComponentLink1Description=DigiKey, ComponentLink2Description=Datasheet, ComponentLink2URL=https://datasheets.raspberrypi.org/rp2040/rp2040-datasheet.pdf, Made By="Robert Pafford", Number of GPIOs=29
U2C: library part TJA1442AT, "CAN Interface IC High-Speed CAN Transceiver with Standby Mode", Supplier Part Number 1=771-TJA1442AT/0Z, Made By="Robert Pafford", Max Data Rate=5Mbps, Supplier 1=Mouser
U2R: "IC FLASH 128MBIT SPI/QUAD 8SOIC", Supplier Part Number 1=W25Q128JVSIQ-ND, Made By="Robert Pafford", Size=128M, Supplier 1=Digi-Key
U5: "800-mA 15-V linear voltage regulator 4-SOT-223 -40 to 125", Package="SOT-223-4 Texas Instruments", Arrow_Electronics-Purchase-URL=https://snapeda.com/shop?store=Arrow+Electronics&id=410186, Availability=Good, DigiKey-Purchase-URL=https://snapeda.com/shop?store=DigiKey&id=410186, MF="Texas Instruments", Mouser-Purchase-URL=https://snapeda.com/shop?store=Mouser&id=410186, MP=LM1117IMPX-3.3/NOPB, Price=None, SnapEDA_Link=https://www.snapeda.com/parts/LM1117IMPX-3.3/NOPB/Texas%20Instruments/view-part/410186/?ref=snap, Texas_Instruments-Purchase-URL=https://snapeda.com/shop?store=Texas+Instruments&id=410186
U7: library part CMP-1575-00036-4, "High Speed CMOS 8-Channel Analog Multiplexer/Demultiplexer, D0016A, LARGE T&R", Generic Part Number=CD74HC4051, Manufacturer="Texas Instruments", Operating Temperature Range(C)="-55 to 125", Rating=Catalog, Bandwidth(Max)(MHz)=180, Code_JEDEC="MS-012 variation AC", Configuration="1 X 1：8 MUX", Crosstalk=Yes, DatasheetVersion=SCHS122J, Output Type=CMOS, PackageReference=D0016A, PackageVersion=http://www.ti.com/lit/ml/mpds178g/mpds178g.pdf, Ron(Max)(Ohms)=130, Ron(Typ)(Ohms)=45, VCC(Max)(V)=6, VCC(Min)(V)=2
Y1R: library part CRYSTAL_12MHz_SMD_SMALL, "12 MHz ±20ppm Crystal 18pF 100 Ohms 4-SMD, No Lead (3.2x2.5mm)", Frequency="12 MHz", Load Capacitance=18pF, Supplier Part Number 1=2151-RH100-12.000-18-2030-EXT-TRCT-ND, ESR="100 Ohms", Made By="Robert Pafford", Supplier 1=Digi-Key

## Free pads (board coordinates)
  round 0 hole 165 unplated: 1(190,310) 1(190,4580) 1(2710,310) 1(2710,4580)

## Via types
v1: diameter 40, hole 20, Top Layer to Bottom Layer, tented both sides, 289 vias
v2: diameter 18, hole 11.81, Top Layer to Bottom Layer, tented both sides, 171 vias
v3: diameter 27.56, hole 11.81, Top Layer to Bottom Layer, 32 vias
v4: diameter 19.68, hole 7.87, Top Layer to Bottom Layer, 21 vias
v5: diameter 19.68, hole 11.81, Top Layer to Bottom Layer, 14 vias
v6: diameter 27.56, hole 11.81, Top Layer to Bottom Layer, tented top, 9 vias
v7: diameter 45.28, hole 27.56, Top Layer to Bottom Layer, 7 vias
v8: diameter 31.5, hole 15.75, Top Layer to Bottom Layer, 7 vias
v9: diameter 31.5, hole 15.75, Top Layer to Bottom Layer, tented top, 6 vias
v10: diameter 26, hole 11.81, Top Layer to Bottom Layer, 1 vias
v11: diameter 22, hole 10, Top Layer to Bottom Layer, tented both sides, 1 vias
v12: diameter 28, hole 12, Top Layer to Bottom Layer, tented both sides, 1 vias

## Nets (pads, with @x,y where several pads share a name; then routed paths per layer and width w, separated by ;. In a path a pad name is that pad's centre, name@x,y a point inside that pad or via, vN(x,y) a via of type N, cw(c..) or ccw(c..) an arc to the next point about the centre after c; other vN are vias at no path point)
1v1_RP2040: C11R.1 C12R.1 C13R.1 U1R.23 U1R.45 U1R.50 | length 566.2
  Top Layer w7.87: U1R.23@1983.52,1138.74 2019.04,1138.74 2019.66,1138.13 2028.76,1138.13 v3(2032.53,1134.36) ; U1R.45@2254.19,1091.5 v3(2205.47,1091.5) v3(2205.47,1170.24) U1R.50@2254.19,1170.24
  Bottom Layer w15.75: C12R.1@1978.5,1122.99 1978.5,1123.78 1985.59,1130.87 1986.38,1130.87 1990.42,1134.91 2031.98,1134.91 v3(2032.53,1134.36) ; v3@2032.24,1134.91 2067.57,1170.24 v3(2205.47,1170.24) C13R.1@2205.47,1216.1 ; v3(2205.47,1091.5) C11R.1@2251.34,1091.5
3V3_RP2CAN: C1C.1 C3C.1 C3R.1 C4R.1 C5C.1 C5R.1 C6R.1 C7R.1 C8R.1 C9R.1 C10R.1 C11.1 C12.1 C13.1 D1C.4 J1R.2 R1C.1 R2.1 R3.1 R4.2 R4C.1 R4R.1 R5R.1 R18.1 R19.1 R30.1 R31.1 R33.1 R39.1 U1C.14 U1R.1 U1R.10 U1R.22 U1R.33 U1R.42 U1R.43 U1R.44 U1R.48 U1R.49 U2C.5 U2R.8 U5.2 U5.4 | length 5658.2
  Top Layer w7.87: C1C.1@1614.92,664.92 C1C.1@1615.41,665.41 ; U1R.22@1983.52,1154.49 2017.39,1154.49 2022,1159.1 v3(2022,1180) 2022,1261.68 2028.98,1268.66 2054.02,1268.66 2070.26,1268.66 2079.49,1277.89 U1R.10@2079.49,1297.7 2079.49,1345.86 2076.47,1348.88 2076.47,1369.53 v10(2073,1373) ; v6(2047.99,1067.87) 2051.76,1064.11 2062.22,1064.11 2079.49,1046.84 U1R.33@2079.49,1027.03 ; U1R.1@2221.22,1297.7 2221.22,1322.73 2234.08,1335.59 v3(2236.97,1335.59) ; 2227.72,1009.13 2223.1,1013.74 2221.22,1013.74 U1R.42@2221.22,1027.03 2221.22,1040.32 U1R.43@2240.91,1060 ; U1R.48@2254.19,1138.74 2283.23,1138.74 v6(2298.98,1154.49) U1R.49@2254.19,1154.49 ; C4R.1@2307.83,1053.5 C4R.1@2307.05,1053.5 ; C4R.1@2307.05,1053.5 2299.96,1060.59 2299.96,1061.38 2285.59,1075.75 U1R.44@2254.19,1075.75 U1R.43@2254.19,1060 2267.48,1060 2273.98,1053.5 C4R.1@2307.05,1053.5
  Top Layer w9.84: C5C.1@1685.79,1434.16 1688.2,1431.75 1740.61,1431.75 D1C.4@1740.91,1432.05 ; U1C.14@1696.12,665.41 1712.85,665.41 1788.74,741.3 2014.02,741.3 v7(2016.89,744.17) ; U2R.8@2540.32,1144.7 v7(2540.32,1217.48)
  Top Layer w10: C5C.1@1685.79,1432.03 C5C.1@1685.79,1434.16 ; 2590,1550 2619.02,1579.02 2731.37,1579.02 2735.09,1575.3 R18.1@2833,1575.3
  Top Layer w11.81: 1347.2,989.13 1345.3,991.04 1345.3,1042.34 1350.03,1047.07 1350.03,1074.83 J1R.2@1353.7,1078.5
  Top Layer w15: C13.1@932,760 932,623 U5.4@951,604 ; 1301.78,601.22 1326,577 1585,577 v3(1677.74,484.26) ; v3(1750,479) 1750.25,478.75 1750.25,427.08 R31.1@1750.5,426.83 R30.1@1750.5,340.82 ; 2584,1524 2585,1525 R2.1@2625.3,1525 ; 2586,1265 C12.1@2632,1265 ; 2588.01,1458.99 R3.1@2626.3,1458.99 ; 2590,1395 2620,1395 2640.7,1374.3 R19.1@2753,1374.3
  Top Layer w15.75: C1C.1@1615.41,665.41 U1C.14@1696.12,665.41 ; 2524.23,765.77 2551,739 ; C3R.1@2540.32,1067.87 U2R.8@2540.32,1144.7
  Top Layer w40: C11.1@595.49,615 606.18,604.31 700.69,604.31 U5.2@701,604 932,604 U5.4@951,604 971,584 1284.57,584 1308,607.43 1308,657
  Bottom Layer w15: v3(1677.74,484.26) 1741.34,484.26 1746.6,479 v3(1750,479) ; v3(1966,1491) 2244,1491 v3(2245,1490)
  Bottom Layer w15.75: v9(1937.76,1036.38) 1961.77,1060.39 1997.23,1060.39 1997.62,1060 2040.12,1060 v6(2047.99,1067.87) ; v3(1969.14,1375.59) 1997.47,1347.25 2046.96,1347.25 2072.71,1373 v10(2073,1373) 2074.96,1374.96 2074.96,1399.84 C6R.1@2078,1402.87 ; C8R.1@1978.5,1182.15 1979.58,1181.08 2020.92,1181.08 v3(2022,1180) ; v6@2047.3,1060 2047.3,1025.26 C9R.1@2046.61,1024.57 2046.61,950.39 v9(2076.12,920.88) ; v3(2236.97,1335.59) C7R.1@2236.97,1373.58
  Bottom Layer w23.62: v6(2298.98,1154.49) C5R.1@2345.83,1154.49 2345.83,1100.75 2384.7,1061.87
  Bottom Layer w45.28: v7(1226.89,1214.17) 1226.89,1213.61 1199.56,1186.28 1199.56,890.28 1226.5,863.35 1276.14,863.35 v7(1299.96,839.53) ; v7(2016.89,744.17) 2017.06,744 v7(2286,744) ; v7(2356,931) 2356,1033.17 2384.7,1061.87 v7(2540.32,1217.48)
5V: C4C.1 C10.1 C16.2 J6.5 R32.1 U2C.3 U5.3 U7.16 | length 3157.9
  Top Layer w7.87: v2(597,468.31) 597,471.05 585,483.05 585,503.51 600.49,519 C10.1@600.49,524 ; C10.1@600.49,535.58 611.55,524.52 C10.1@611.55,513.76
  Top Layer w15: U5.3@701,513.45 1363,513.45 1364.8,515.25 1524.25,515.25 v3(1526,517) ; v9(2065,415) 2101.03,415 U7.16@2104.41,411.63 ; C16.2@2104,501 2104.41,500.59 U7.16@2104.41,411.63 ; U7.16@2104.81,411.22 U7.16@2104.41,411.63
  Top Layer w15.75: U2C.3@1438.74,754.29 1441.75,757.3 1493.33,757.3 v3(1496.81,760.79) 1500.58,757.02 1509.83,757.02 C4C.1@1528.31,738.54
  Top Layer w40: J6.5@481.41,800 481.41,798.07 547.62,731.86 547.62,588.45 C10.1@600.49,535.58 ; C10.1@611.55,513.76 700.69,513.76 U5.3@701,513.45
  Bottom Layer w7.87: v2(597,468.31) 1194.31,468.31 1483.02,757.02 1493.04,757.02 v3(1496.81,760.79)
  Bottom Layer w15: v3(1526,517) 1903,517 2005,415 v9(2065,415)
12V: J6.6 J7.1 | length 318.7
  Bottom Layer w50: J6.6@481.41,918.11 481.41,1101.74 574.4,1194.73 J7.1@574.4,1198.32
CANCLK_RP2CAN: U1C.6 U1R.32 | length 217.8
  Top Layer w7.87: U1C.6@1911.18,915.91 1985.47,915.91 2063.74,994.17 U1R.32@2063.74,1027.03
CANH: J6.4 SW1C.4 U2C.7 | length 1207.1
  Top Layer w7.87: J6.4@481.41,681.89 434,729.3 434,951 463,980 861,980 944.34,896.66 982.98,896.66 SW1C.4@983.03,896.61 994.84,896.61 1010.59,880.87 1010.59,877.52 1183.82,704.29 U2C.7@1224.17,704.29
CANL: J6.1 SW1C.1 U2C.6 | length 1276.5
  Top Layer w8: J6.1@363.3,681.89 410.17,728.76 410.17,966.17 451,1007 871,1007 944.05,933.95 1013.67,933.95 1051.01,896.61 SW1C.1@1128.7,896.61 1128.7,833.03 1207.44,754.29 U2C.6@1224.17,754.29
CANRX_RP2CAN: U1C.2 U2C.4 | length 845.6
  Top Layer w7.87: U2C.4@1438.74,804.29 1422.01,804.29 1398.39,780.67 1398.39,644.51 1416.55,626.34 1921.75,626.34 1951.54,656.12 1951.54,692.28 1927.91,715.91 U1C.2@1911.18,715.91
CANTX_RP2CAN: U1C.1 U2C.1 | length 487.4
  Top Layer w7.87: U2C.1@1438.74,654.29 1541.08,654.29 1553.29,642.09 1722.93,642.09 1746.75,665.91 U1C.1@1911.18,665.91
DBG_TX_RP2040: J1R.5 U1R.27 | length 714.8
  Top Layer w7.87: J1R.5@1403.7,1178.5 1405.2,1178.5 1423.76,1197.07 1436.79,1197.07 1453.67,1213.94 1531.85,1213.94 1594.06,1151.73 1594.06,1129.71 v3(1597.2,1126.56) ; v3(1662.17,1034.41) 1666.78,1034.41 1676.62,1044.25 1811.04,1044.25 1842.53,1075.75 U1R.27@1983.52,1075.75
  Bottom Layer w7.87: v3(1597.2,1126.56) 1658.44,1065.33 1658.44,1038.14 v3(1662.17,1034.41)
DRVOFF: DRVOFF.TP U1.8 U1R.15 U2.8 U3.8 U4.8 U6.8 | length 11404.8
  Top Layer w7.87: v2(175,3748.74) 107.74,3748.74 85,3726 85,1654 146,1593 709,1593 783.87,1667.87 1150.94,1667.87 1158.81,1675.75 1730.35,1675.75 1816.83,1589.26 v2(1885,1589.26) ; v2(178,3803) 370.33,3803 608.65,4041.32 v2(608.65,4138.62) ; v2(593.43,4327.79) 594.98,4326.24 594.98,4315.02 612.72,4297.28 615.22,4297.28 623.51,4289 U6.8@624.9,4289 ; U1.8@1487.11,3682.72 1487.11,3675.83 1488.09,3674.85 1488.09,3666.56 1511.3,3643.35 1521.31,3643.35 1630.66,3534 v2(1790.15,3534) ; U2.8@1487.96,3102.72 1488.94,3101.74 1488.94,3086.56 1512.15,3063.35 1522.16,3063.35 1631.51,2954 v2(1791,2954) ; U4.8@1488.94,1924.85 1488.94,1916.56 1512.14,1893.35 1522.16,1893.35 1576,1839.51 1576,1804.59 1596.59,1784 DRVOFF.TP@1599,1784 1602.59,1784 1622.59,1764 1811,1764 v2(1872,1703) ; U3.8@1488.94,2509.85 1488.94,2501.56 1512.15,2478.35 1522.16,2478.35 1631.51,2369 v2(1791,2369) ; v2(1981.05,1317.65) 1981.05,1264.72 U1R.15@1983.52,1264.72 ; v2(2084,1702) 2368.11,1702 2427.11,1761 2427.11,2367 v2(2427.11,2954) ; v2@2427.11,2954.89 2427.11,3506.06 2433,3511.96 v2(2433,3534)
  Bottom Layer w7.87: v2(175,3748.74) 176.5,3750.24 176.5,3801.5 v2(178,3803) ; v2(593.43,4327.79) 594.98,4326.24 594.98,4315.02 620.74,4289.26 620.74,4226.29 613,4218.55 613,4163.37 609.06,4159.43 609.06,4139.03 v2(608.65,4138.62) ; v2(1790.15,3534) v2(2433,3534) ; v2(1791,2369) 1792.94,2367.06 1800.1,2367.06 1800.16,2367 v2(2428,2367) ; v2(1791,2954) v2(2427.11,2954) ; v2(1885,1589.26) v2@1881.87,1586.13 ; v2(1981.05,1317.65) 1965.2,1333.49 1965.2,1336.8 1938,1364 1938,1534 1885.87,1586.13 v2@1881.87,1586.13 ; v2(2084,1702) 2083.5,1702.5 1872.5,1702.5 v2(1872,1703) 1848.25,1679.25 1848.25,1626.01 1881.87,1592.39 v2@1881.87,1586.13
GND: C1.1 C2.1 C3.2 C4.2 C5.1 C6.1 C7.1 C8.2 C9.2 C14.1 C15.2 D2.2 J1.1 J1.2 J1.3 J1.4 J5.1 Q6.2 R9.2 R10.2 R11.2 R12.2 R13.2 R14.2 R15.2 R16.2 R17.2 R22.2 R23.2 R24.2 R25.2 R26.2 R27.2 R28.2 R29.2 U1.6 U2.6 U3.6 U4.6 U6.6 U6.11 U6.12 U6.13 U6.14 | length 355
  Top Layer w7.87: v2(611.13,4413.36) 612.37,4412.11 612.37,4396.18 U6.14@607.5,4391.31 U6.13@621.42,4377.39 U6.12@635.34,4363.47 U6.11@649.26,4349.55
  Top Layer w10: D2.2@2608,3653 D2.2@2609,3652
  Top Layer w15: D2.2@2609,3652 v9(2660,3652)
  Top Layer w20: v1(979,1912.37) Q6.2@979,1948.5 ; C5.1@1997.5,4681.5 1997.5,4678.79 1992.5,4673.79 1967.79,4673.79 1935,4641 1935,4611.16 1946,4600.16 v12(1946,4598) 1947.53,4599.53 1997.03,4599.53 R9.2@1999,4601.5